# Altium PCB PowerModule_PCBDesign_v2.PcbDoc
Units mm, origin at the board's own origin, x right, y up, seen from the top; angles counter-clockwise.
Board outline 130 x 70 mm, 4 copper layers (Top Layer, Internal Plane 1, Internal Plane 2, Bottom Layer); 32 components, 31 nets, 100 pads, 0 vias.
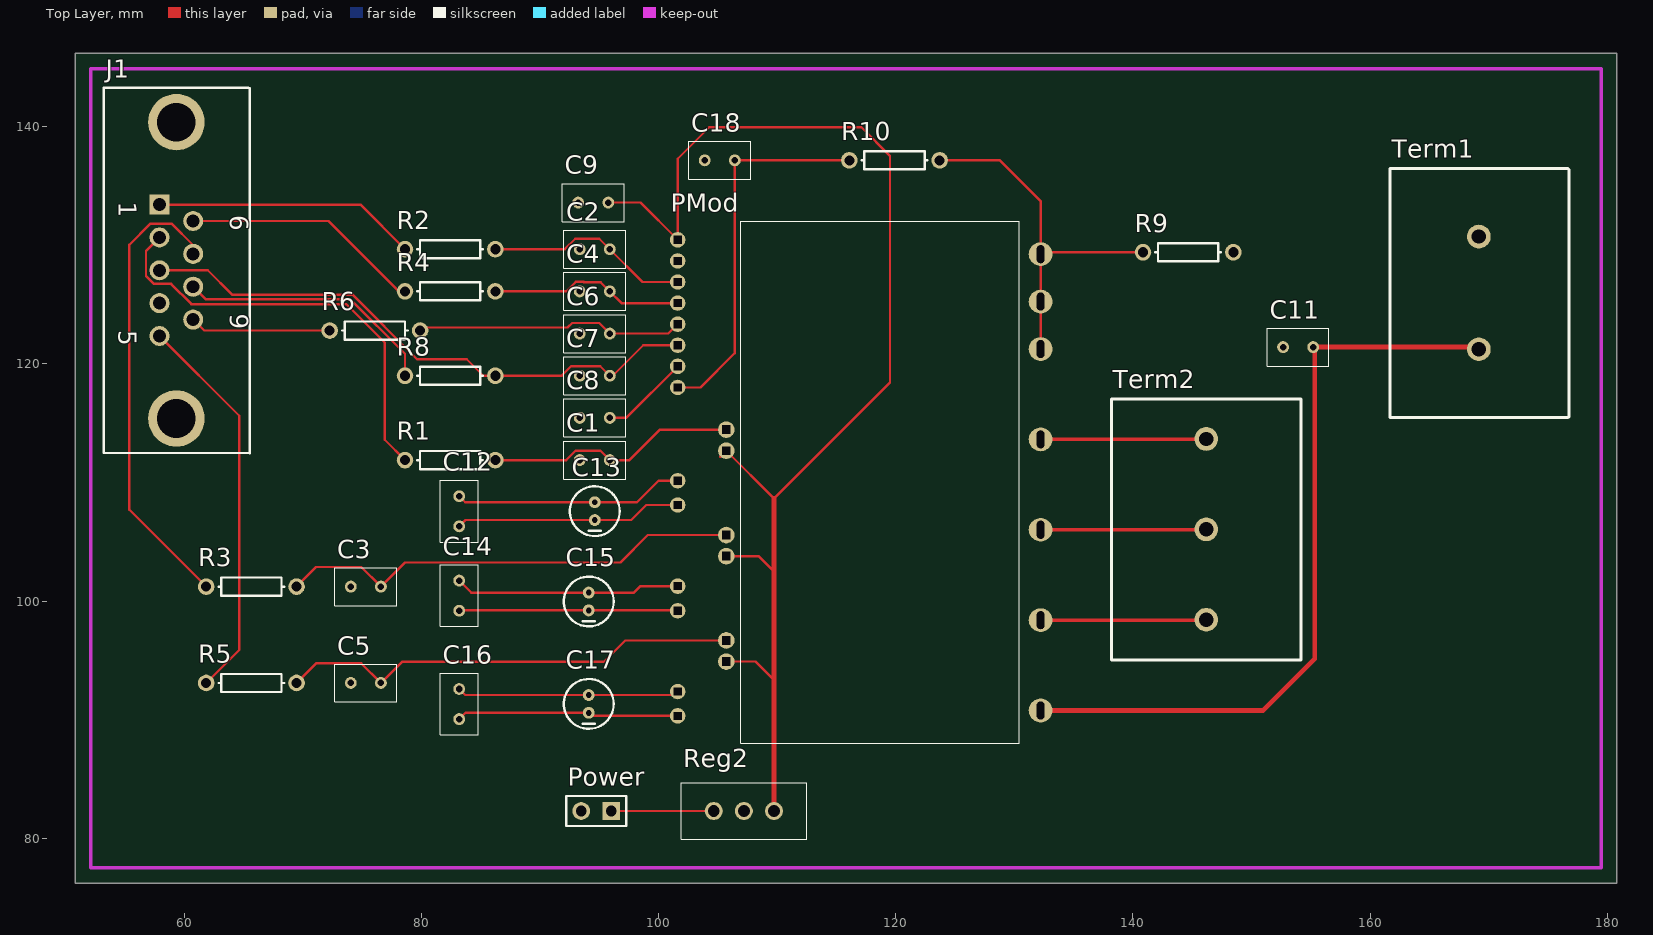
[diagram p0: Top Layer view]
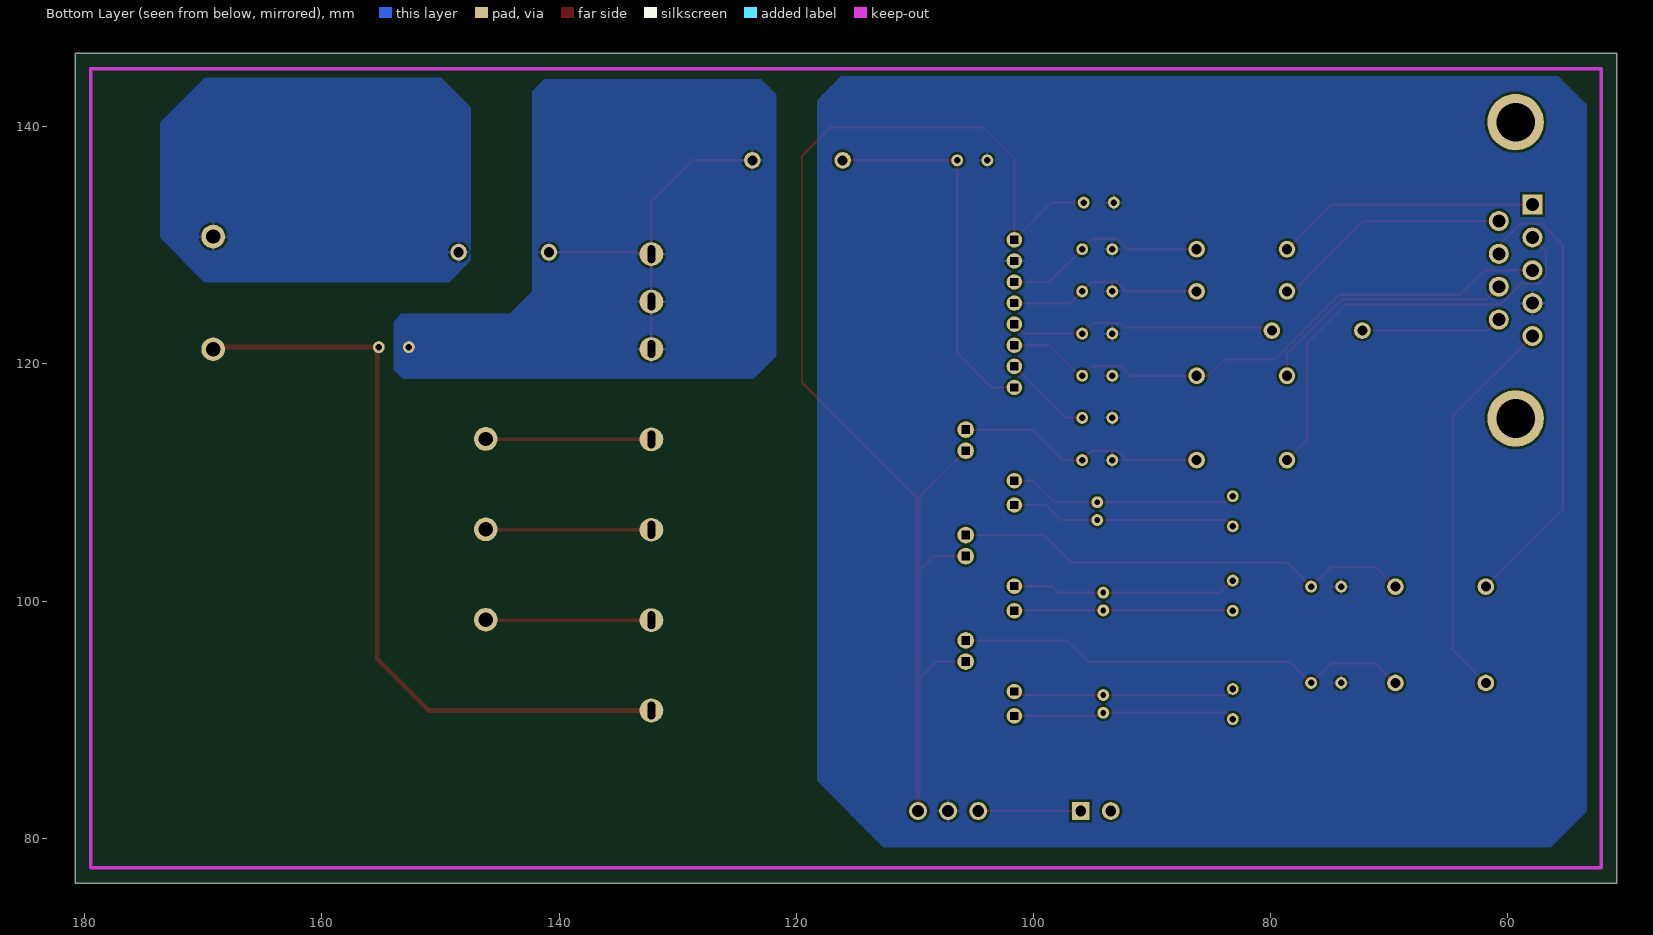
[diagram p1: Bottom Layer view, seen from below]
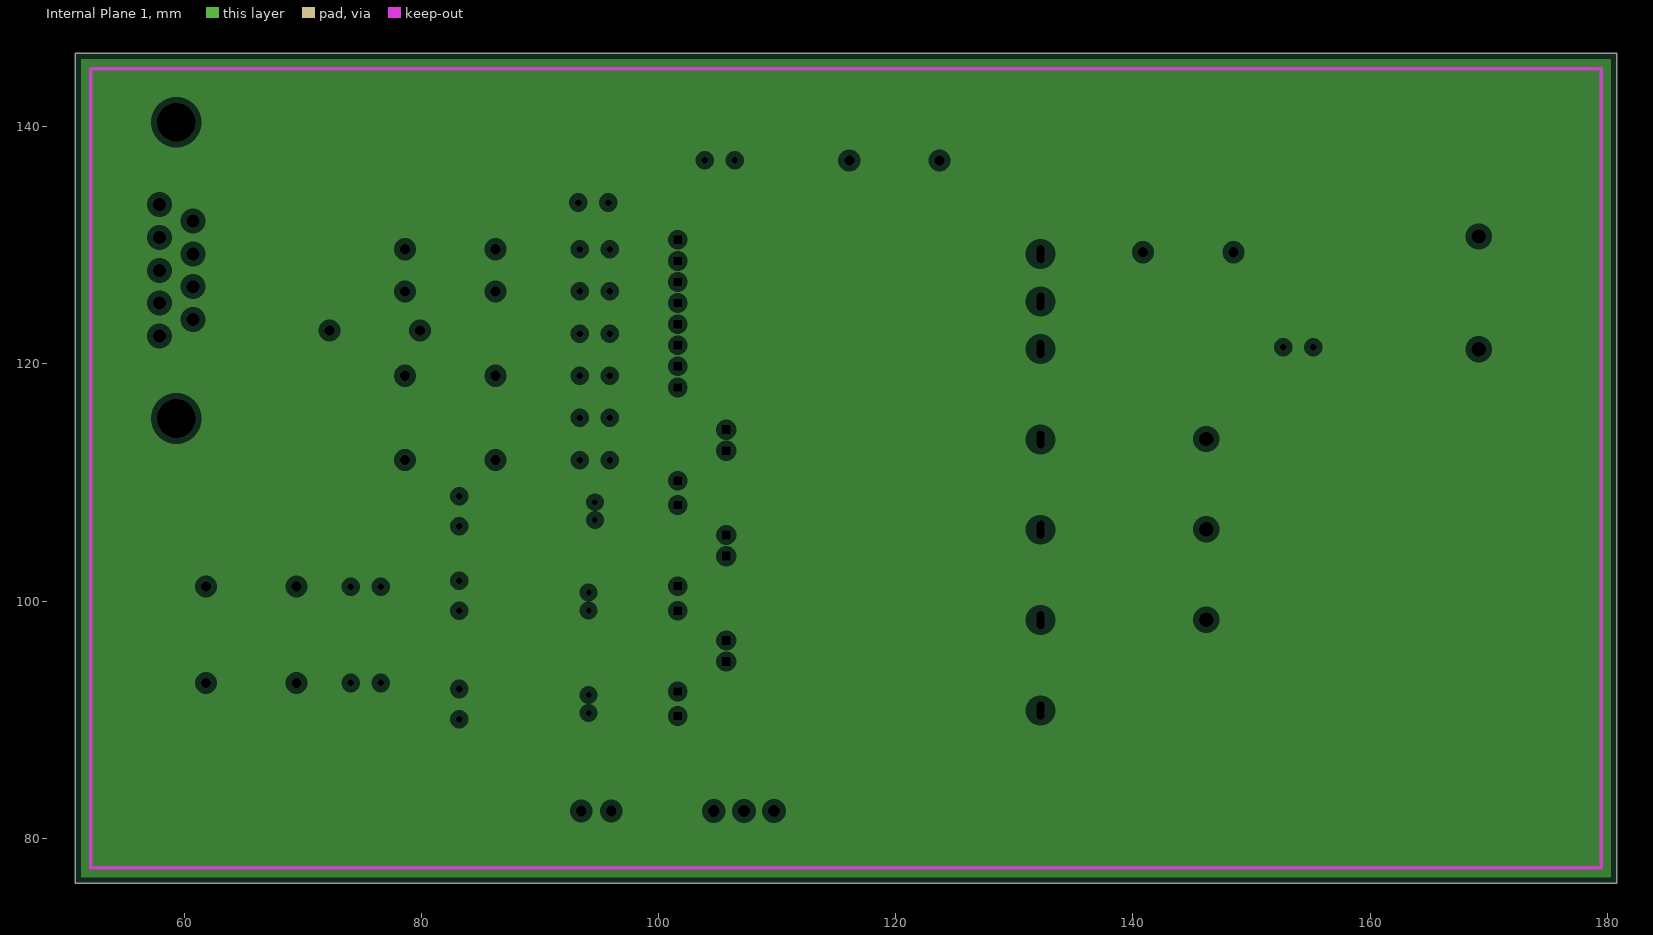
[diagram p2: Internal Plane 1, clearances drawn from the general rule]
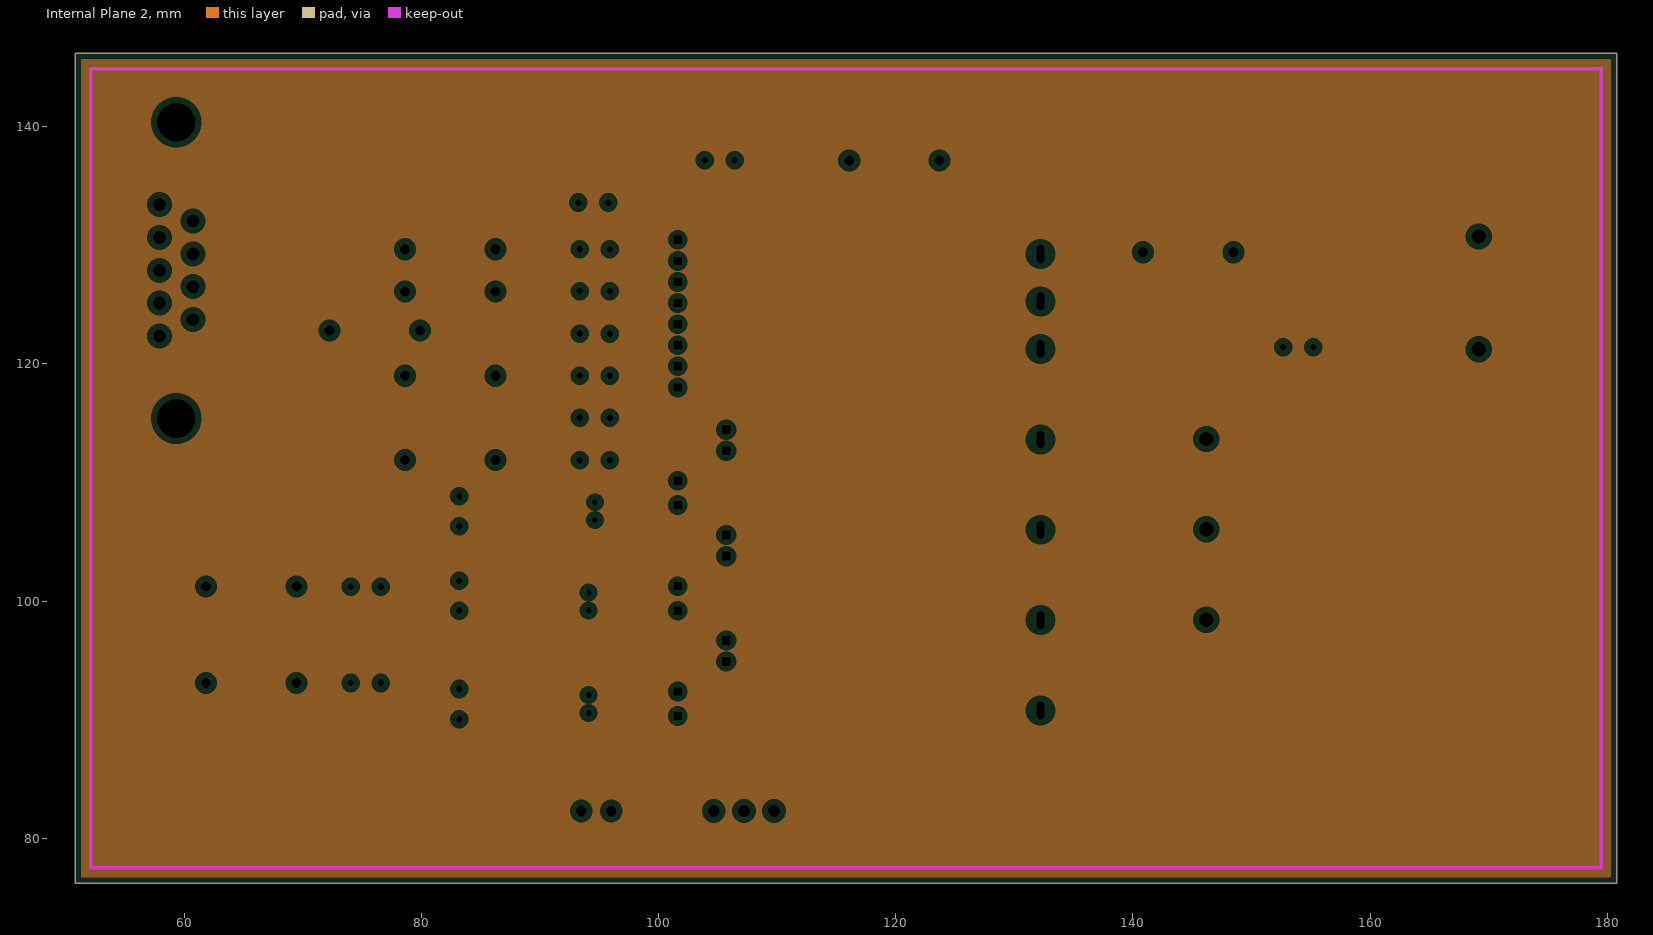
[diagram p3: Internal Plane 2, clearances drawn from the general rule]

## Layer stack, top to bottom
Top Layer: signal copper 0.0356
Dielectric: dielectric 0.32, FR-4, Dk 4.8
Internal Plane 1: plane copper 0.0356
Dielectric: dielectric 0.32, FR-4, Dk 4.8
Internal Plane 2: plane copper 0.0356
Dielectric: dielectric 0.32, FR-4, Dk 4.8
Bottom Layer: signal copper 0.0356

## Board outline
50.8,76.2 180.8,76.2 180.8,146.2 50.8,146.2

## Design rules (kind name [scope] priority, off if disabled: settings)
Clearance [All] p1: gap=0.2
PlaneClearance [All] p1: clearance=0.508
PlaneConnect [All] p1: planeconnectstyle=Relief reliefexpansion=0.508 reliefentries=4 reliefconductorwidth=0.254 reliefairgap=0.254
PolygonConnect [All] p1: connectstyle=Relief reliefconductorwidth=0.254 reliefentries=4 polygonreliefangle="90 Angle"
RoutingVias [All] p1: holewidth=0.6 width=1 viastyle="Through Hole" minholewidth=0.711 minwidth=1.27 maxholewidth=0.711 maxwidth=1.27
SilkscreenOverComponentPads [All] p1: minsilkscreentomaskgap=0.254
SolderMaskExpansion [All] p1: expansion=0.102
Width [All] p1: maxlimit=0.4 minlimit=0.2 preferedwidth=0.2 minimp=50.000000 maximp=50.000000 favimp=50.000000
25 further rules are at their usual default settings.

## Components (designator, comment, footprint, x,y, rotation, side; value= is the part's Value field where it differs from the comment)
C1 "Cap" NPolar_Cap 94.615,111.887 r0 top
C2 "Cap" NPolar_Cap 94.615,129.667 r0 top
C3 "Cap" NPolar_Cap 75.311,101.219 r0 top
C4 "Cap" NPolar_Cap 94.615,126.111 r0 top
C5 "Cap" NPolar_Cap 75.311,93.091 r0 top
C6 "Cap" NPolar_Cap 94.615,122.555 r0 top
C7 "Cap" NPolar_Cap 94.615,118.999 r0 top
C8 "Cap" NPolar_Cap 94.615,115.443 r0 top
C9 "Cap" NPolar_Cap 94.488,133.604 r0 top
C11 "Cap" NPolar_Cap 153.924,121.412 r0 top
C12 "Cap" NPolar_Cap 83.185,107.569 r90 top
C13 "Cap2" Polar_Cap 94.615,108.331 r270 top
C14 "Cap" NPolar_Cap 83.185,100.457 r90 top
C15 "Cap2" Polar_Cap 94.107,100.711 r270 top
C16 "Cap" NPolar_Cap 83.185,91.313 r90 top
C17 "Cap2" Polar_Cap 94.107,92.075 r270 top
C18 "Cap" NPolar_Cap 105.156,137.16 r0 top
J1 "D Connector 9" DSUB1.385-2H9 59.309,127.889 r270 top
PMod "FSBB15CH60C" FSBB20CH60F 132.207,88.011 r90 top
Power "Header 2" HDR1X2 96.012,82.296 r180 top
R1 "Res1" AXIAL-0.3 82.423,111.887 r0 top
R2 "Res1" AXIAL-0.3 82.423,129.667 r0 top
R3 "Res1" AXIAL-0.3 65.659,101.219 r0 top
R4 "Res1" AXIAL-0.3 82.423,126.111 r0 top
R5 "Res1" AXIAL-0.3 65.659,93.091 r0 top
R6 "Res1" AXIAL-0.3 76.073,122.809 r0 top
R8 "Res1" AXIAL-0.3 82.423,118.999 r180 top
R9 "Res1" AXIAL-0.3 144.653,129.413 r180 top
R10 "Res1" AXIAL-0.3 119.888,137.16 r0 top
Reg2 "U7800" U7800 104.648,82.296 r0 top
Term1 "Terminal Block 2P" "Terminal Block 2 Pin" 169.164,125.984 r90 top
Term2 "Terminal Block 3P" "Terminal Block 3 Pin" 146.177,106.045 r270 top

## Footprints (in the part's own frame and the unit in brackets; to place one, negate y for a bottom-side part, rotate by r counter-clockwise, add the part's x,y. Pads: shape width x height; smd on the part's side, far side on the other; paste and mask are expansions set on the pad)
AXIAL-0.3 [mm] "Axial Device, Thru-Hole; 2 Leads; 0.3 in Pin Spacing"
  round 1.4 hole 0.85: 1(-3.81,0) 2(3.81,0)
  silkscreen extent -2.77,-0.76 2.77,0.76
DSUB1.385-2H9 [mm] "Connector; D Subminiature; 9 Position; Right Angle; Pitch 1.385 mm"
  rect 1.69x1.69 hole 1.09: 1(-5.54,-1.395)
  round 1.69 hole 1.09: 2(-2.77,-1.395) 3(0,-1.395) 4(2.77,-1.395) 5(5.54,-1.395) 6(-4.155,1.445) 7(-1.385,1.445) 8(1.385,1.445) 9(4.155,1.445)
  round 4.76 hole 3.26: 10(-12.495,0.025) 11(12.495,0.025)
  silkscreen extent -15.4,-6.09 15.43,6.22
FSBB20CH60F [mm]
  round 1.3 hole 0.65 square: 1(42.447,30.6) 2(40.669,30.6) 3(38.891,30.6) 4(37.113,30.6) 5(35.335,30.6) 6(33.557,30.6) 7(31.779,30.6) 8(30,30.6) 11(22.136,30.6) 12(20.086,30.6) 15(13.246,30.6) 16(11.169,30.6) 19(4.356,30.6) 20(2.306,30.6)
  round 1.4 hole 0.7 square: 9(26.445,26.5) 10(24.667,26.5) 13(17.555,26.5) 14(15.777,26.5) 17(8.665,26.5) 18(6.887,26.5)
  round 2 hole 0.65 slot 1.5 at 0 deg: 21(41.24,0) 22(37.24,0) 23(33.24,0) 24(25.62,0) 25(18,0) 26(10.38,0) 27(2.76,0)
  silkscreen extent 0,1.78 44,25.27
HDR1X2 [mm] "Connector; Header; 2 Position"
  rect 1.5x1.5 hole 0.9: 1(0,0)
  round 1.5 hole 0.9: 2(2.54,0)
  silkscreen extent -1.27,-1.27 3.81,1.27
NPolar_Cap [mm]
  round 1 hole 0.55: 1(-1.27,0) 2(1.27,0)
  silkscreen extent -2.6,-1.6 2.6,1.6
Polar_Cap [mm]
  round 1 hole 0.5: 1(0,0) 2(1.5,0)
  silkscreen extent -1.35,-2.1 2.85,2.1
"Terminal Block 2 Pin" [mm]
  round 2 hole 1.2: 1(-4.75,0) 2(4.75,0)
  silkscreen extent -10.5,-7.62 10.5,7.5
"Terminal Block 3 Pin" [mm]
  round 2 hole 1.2: 1(-7.62,0) 2(0,0) 3(7.62,0)
  silkscreen extent -11,-8 11,8
U7800 [mil]
  round 60 hole 39.37: 1(0,0) 2(100,0) 3(200,0)
  silkscreen extent -109,-94 309,94

## Part data
C1 C2 C3 C4 C5 C6 C7 C8 C9 C11 C12 C13 C14 C15 C16 C17 C18: "Capacitor"
J1: "Receptacle Assembly, 9 Position, Right Angle"
Power: "Header, 2-Pin"
R1 R2 R3 R4 R5 R6 R8 R9 R10: "Resistor"

## Nets (pads, with @x,y where several pads share a name; then routed paths per layer and width w, separated by ;. In a path a pad name is that pad's centre, name@x,y a point inside that pad or via, vN(x,y) a via of type N, cw(c..) or ccw(c..) an arc to the next point about the centre after c; other vN are vias at no path point)
5V: J1.8 R8.2 | length 22
  Top Layer w0.2: J1.8 61.821,125.437 74.022,125.437 78.613,120.846 R8.2
15V: C9.2 PMod.1 PMod.10 PMod.14 PMod.18 Reg2.3 | length 109
  Top Layer w0.2: C9.2 98.461,133.604 PMod.1 101.607,137.294 104.267,139.954 117.094,139.954 119.507,137.541 119.507,118.436 109.728,108.657 PMod.10 105.17,112.141 ; PMod.18 108.175,94.898 109.728,93.345 ; PMod.14 108.429,103.788 109.728,102.489
  Top Layer w0.4: Reg2.3 109.728,93.345 109.728,102.489 109.728,108.657
24V: Power.1 Reg2.1 | length 8.6
  Top Layer w0.2: Power.1 Reg2.1
CSC: C18.2 PMod.8 R10.1 | length 31.9
  Top Layer w0.2: PMod.8 103.533,118.011 106.426,120.904 C18.2 R10.1
DGND: C1.1 C2.1 C3.1 C4.1 C5.1 C6.1 C7.1 C8.1 C9.1 C18.1 J1.4 PMod.2 Reg2.2 | length 0.7
  Top Layer w0.2: J1.4@57.914,124.458 J1.4
FO: C7.2 J1.3 PMod.6 R8.1 | length 49.1
  Top Layer w0.2: J1.3 61.976,127.889 64.028,125.837 74.188,125.837 79.629,120.396 83.82,120.396 85.217,118.999 R8.1 91.821,118.999 92.621,119.799 95.085,119.799 C7.2 96.139,118.999 98.708,121.568 PMod.6
N_COM: C11.1 PMod.21 PMod.22 PMod.23 R9.2 R10.2 | length 31.1
  Top Layer w0.2: R10.2 128.778,137.16 132.207,133.731 PMod.21 ; PMod.23 PMod.22 PMod.21 ; R9.2 132.369,129.413 PMod.21
NetC8_2: C8.2 PMod.7 | length 7.5
  Top Layer w0.2: C8.2 97.26,115.443 PMod.7
PGND: R9.1 Term1.2
UH: J1.2 R1.1 | length 36.8
  Top Layer w0.2: J1.2 56.769,129.514 56.769,127.415 57.44,126.744 58.895,126.744 60.601,125.037 73.66,125.037 76.904,121.793 76.904,113.596 R1.1
UH': C1.2 PMod.9 R1.2 | length 21.2
  Top Layer w0.2: R1.2 92.214,111.887 93.014,112.687 95.085,112.687 C1.2 97.536,111.887 100.105,114.456 PMod.9
UL: J1.1 R2.1 | length 22.3
  Top Layer w0.2: J1.1 74.851,133.429 R2.1
UL': C2.2 PMod.3 R2.2 | length 17.3
  Top Layer w0.2: R2.2 92.075,129.667 92.964,130.556 94.996,130.556 C2.2 98.65,126.902 PMod.3
UOUT: PMod.24 Term2.1 | length 14
  Top Layer w0.2: Term2.1@146.143,113.631 Term2.1
  Top Layer w0.3: PMod.24 Term2.1@146.143,113.631
V_DC: C11.2 PMod.27 Term1.1 | length 65.3
  Top Layer w0.4: PMod.27 150.969,90.771 155.321,95.123 C11.2@155.321,121.412 ; Term1.1@168.986,121.412 C11.2@155.321,121.412 ; C11.2@155.321,121.412 C11.2 155.321,121.539 C11.2@155.321,121.412
VB(U): C12.2 C13.1 PMod.11 | length 19.4
  Top Layer w0.2: C12.2 83.693,108.331 C13.1 98.171,108.331 99.987,110.147 PMod.11
VB(V): C14.2 C15.1 PMod.15 | length 19.1
  Top Layer w0.2: C14.2 84.201,100.711 C15.1 97.917,100.711 98.463,101.257 PMod.15
VB(W): C16.2 C17.1 PMod.19 | length 18.8
  Top Layer w0.2: C16.2 83.693,92.075 C17.1 101.315,92.075 PMod.19
VH: J1.7 R3.1 | length 39.1
  Top Layer w0.2: 55.361,107.707 R3.1 ; 55.372,107.718 55.372,130.048 57.15,131.826 58.928,131.826 60.754,130 J1.7
VH': C3.2 PMod.13 R3.2 | length 39.4
  Top Layer w0.2: R3.2 71.12,102.87 74.93,102.87 C3.2 78.613,103.251 96.774,103.251 99.089,105.566 PMod.13
VL: J1.6 R4.1 | length 20.3
  Top Layer w0.2: J1.6 72.172,132.044 78.105,126.111 R4.1
VL': C4.2 PMod.4 R4.2 | length 16.4
  Top Layer w0.2: R4.2 92.214,126.111 93.014,126.911 93.676,126.911 93.714,126.873 95.123,126.873 C4.2 96.872,125.124 PMod.4
VOUT: PMod.25 Term2.2 | length 14
  Top Layer w0.2: Term2.2@146.143,106.011 Term2.2
  Top Layer w0.3: PMod.25 Term2.2@146.143,106.011
VS(U): C12.1 C13.2 PMod.12 | length 19.2
  Top Layer w0.2: C12.1 83.717,106.831 C13.2 97.687,106.831 98.953,108.097 PMod.12
VS(V): C14.1 C15.2 PMod.16 | length 18.4
  Top Layer w0.2: C14.1 83.209,99.211 C15.2 101.576,99.211 PMod.16
VS(W): C16.1 C17.2 PMod.20 | length 18.7
  Top Layer w0.2: C16.1 83.717,90.575 C17.2 94.365,90.317 PMod.20
WH: J1.5 R5.1 | length 33.2
  Top Layer w0.2: J1.5 64.643,115.62 64.643,95.885 R5.1
WH': C5.2 PMod.17 R5.2 | length 39.1
  Top Layer w0.2: R5.2 71.12,94.742 74.93,94.742 C5.2 78.359,94.869 95.377,94.869 97.184,96.676 PMod.17
WL: J1.9 R6.1 | length 11.9
  Top Layer w0.2: J1.9 61.679,122.809 R6.1
WL': C6.2 PMod.5 R6.2 | length 22.3
  Top Layer w0.2: R6.2@80.137,123.063 92.329,123.063 92.71,123.444 94.996,123.444 C6.2 100.816,122.555 PMod.5
WOUT: PMod.26 Term2.3 | length 14
  Top Layer w0.2: Term2.3@146.143,98.391 Term2.3
  Top Layer w0.3: PMod.26 Term2.3@146.143,98.391
pads on no net: J1.10 J1.11 Power.2

## Polygon pours and split planes (outlines as drawn)
PGND on Bottom Layer "Bottom PGND" (solid, pour order 1002): 147.489,128.677 149.267,126.899 149.267,126.9 ccw(c149.357,126.989) 149.357,126.862 169.804,126.862 ccw(c169.804,126.989) 169.895,126.9 169.894,126.899 173.577,130.582 ccw(c173.487,130.672) 173.614,130.672 173.614,140.324 ccw(c173.487,140.324) 173.577,140.415 173.577,140.414 169.894,144.097 169.895,144.097 ccw(c169.804,144.007) 169.804,144.135 149.992,144.135 ccw(c149.992,144.007) 149.902,144.097 147.489,141.684 147.489,141.685 ccw(c147.579,141.594) 147.452,141.594 147.452,128.767 ccw(c147.579,128.767)
DGND on Bottom Layer "Bottom_DGND" (solid, pour order 1001): 53.34,82.296 53.34,141.859 55.753,144.272 116.205,144.272 118.237,142.24 118.237,84.836 112.649,79.248 56.388,79.248
N_COM on Bottom Layer "Bottom_N_COM" (solid, pour order 1000): 121.666,120.65 121.666,142.748 122.936,144.018 141.224,144.018 142.24,143.002 142.24,126.111 144.145,124.206 153.289,124.206 153.924,123.571 153.924,119.507 153.162,118.745 123.571,118.745
no net on Internal Plane 1 (split plane): 180.29,76.71 51.31,76.71 51.31,145.69 180.29,145.69
no net on Internal Plane 2 (split plane): 180.29,76.71 51.31,76.71 51.31,145.69 180.29,145.69

## Keep-outs
Keep-Out Layer:
  lines w0.3: 52.1,77.5 52.1,144.9 179.5,144.9 179.5,77.5 52.1,77.5

## Silkscreen, mask and mechanical layers (free items; w line width, h text height)
Mechanical 1:
  lines w0.254: 121.666,120.65 121.666,142.748 122.936,144.018 124.206,144.018 141.224,144.018 142.24,143.002 142.24,126.111 144.145,124.206 153.289,124.206 153.924,123.571 153.924,119.507 153.162,118.745 123.571,118.745 121.666,120.65
Mechanical 2:
  lines w0.254: 53.34,82.296 53.34,141.859 55.753,144.272 56.007,144.272 116.205,144.272 118.237,142.24 118.237,84.836 112.649,79.248 56.388,79.248 53.34,82.296
Drill Drawing:
  text ".LEGEND" at 185.88,81.28 h1.52
  text "Drill Drawing." at 185.88,78.74 h1.52

## Text inside footprints (layer, text, board x,y; h text height)
J1: Top Overlay "1" at 54.459,133.679 h1.5 r270; Top Overlay "5" at 54.459,122.849 h1.5 r270; Top Overlay "9" at 63.859,124.234 h1.5 r270; Top Overlay "6" at 63.859,132.544 h1.5 r270